# Altium PCB HV9150 DevKit.PcbDoc
Units mm, origin at the board's own origin, x right, y up, seen from the top; angles counter-clockwise.
Board outline 50 x 40 mm, 2 copper layers (Top Layer, Bottom Layer); 27 components, 23 nets, 90 pads, 31 vias.
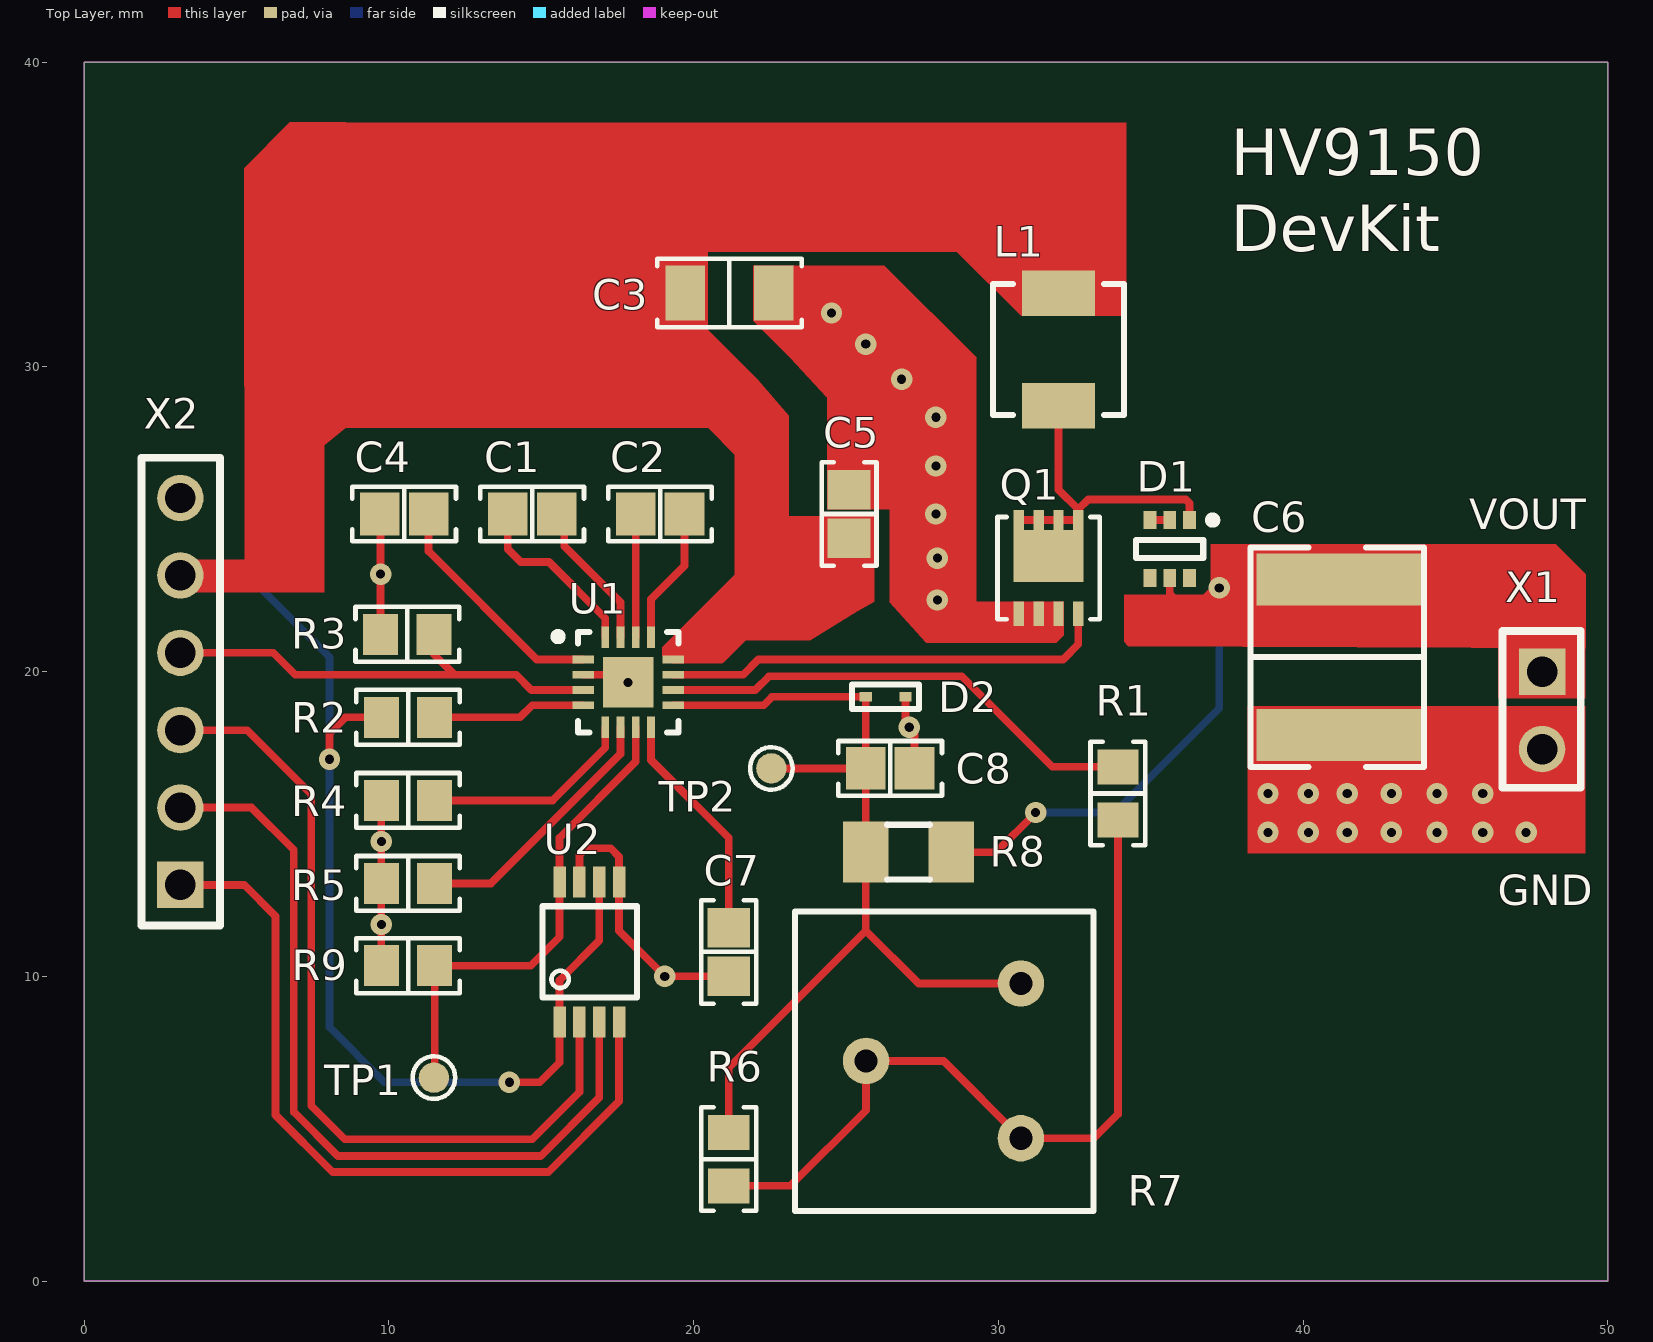
[diagram p0: Top Layer view]
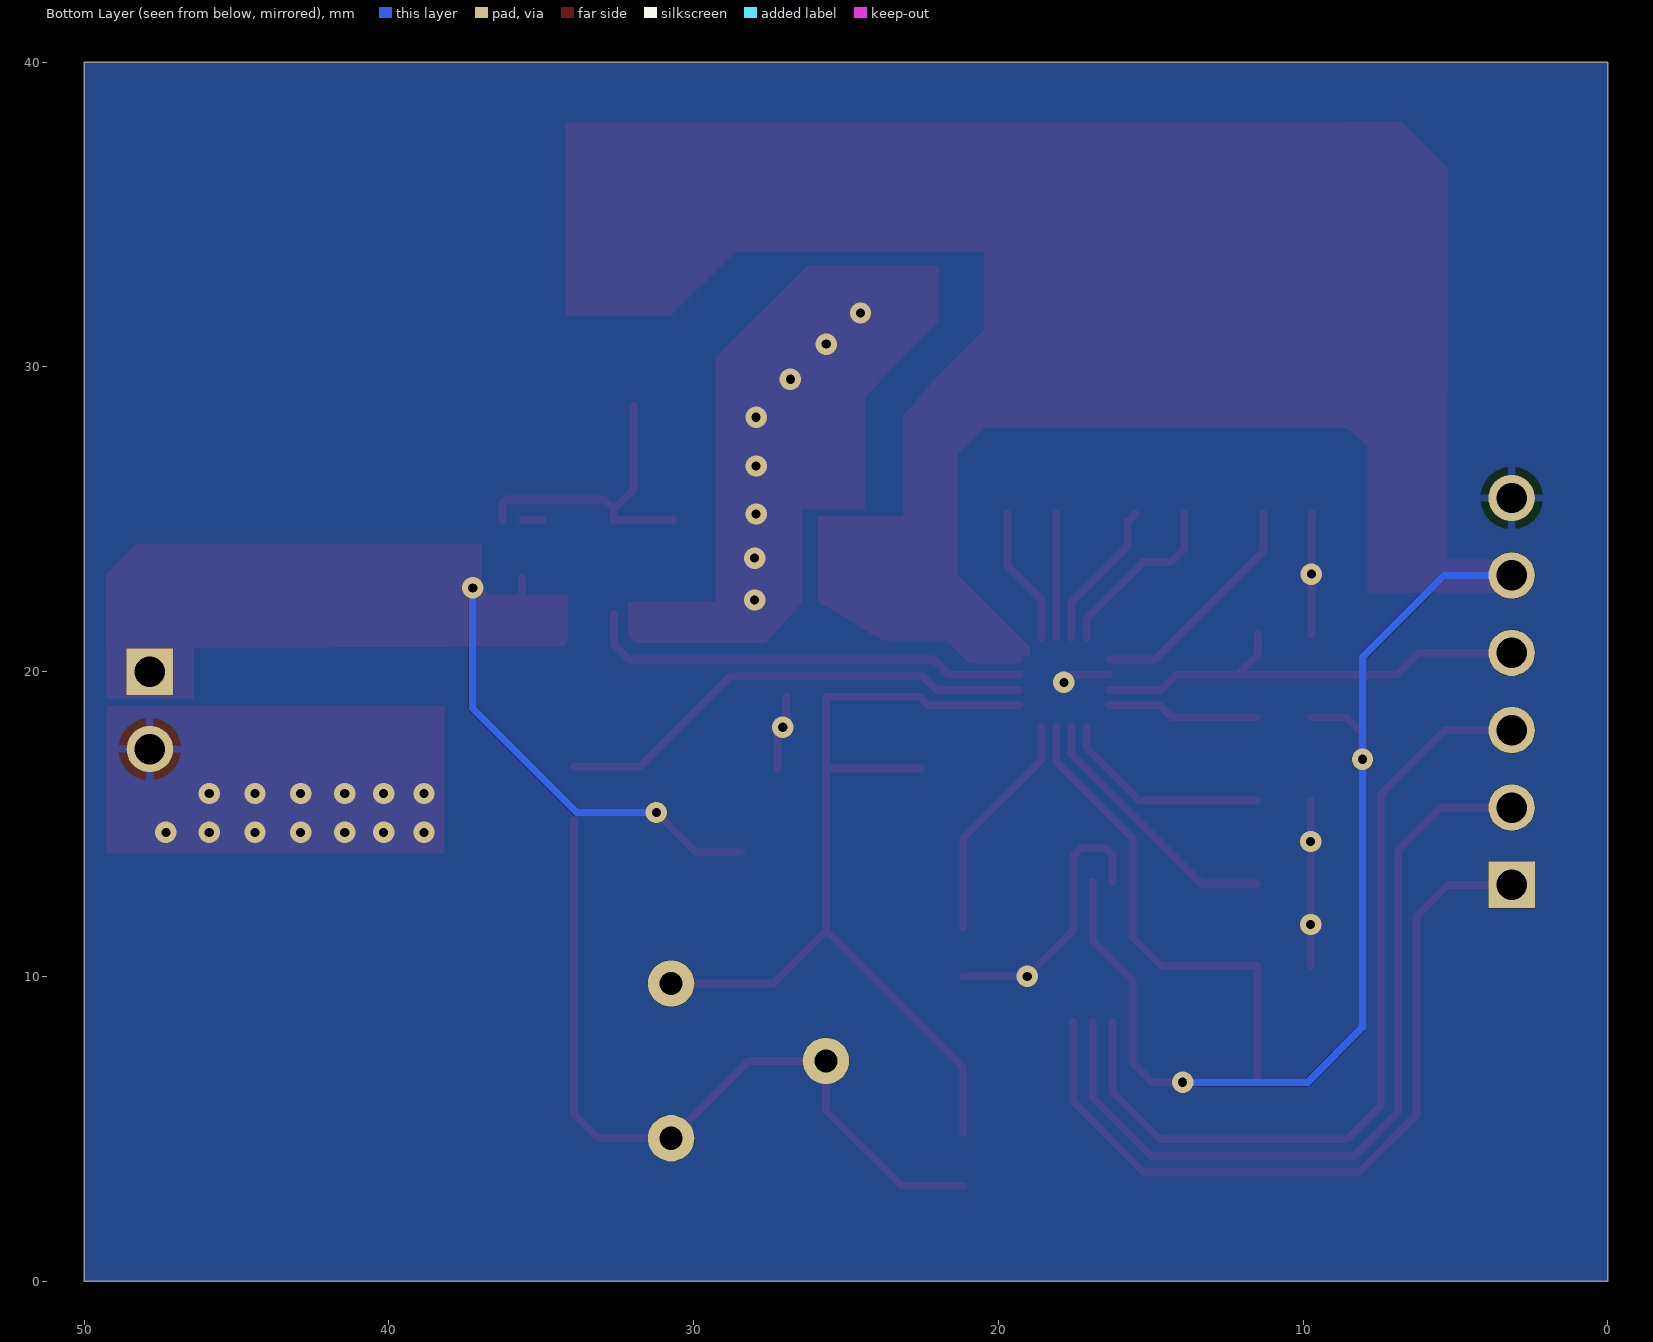
[diagram p1: Bottom Layer view, seen from below]
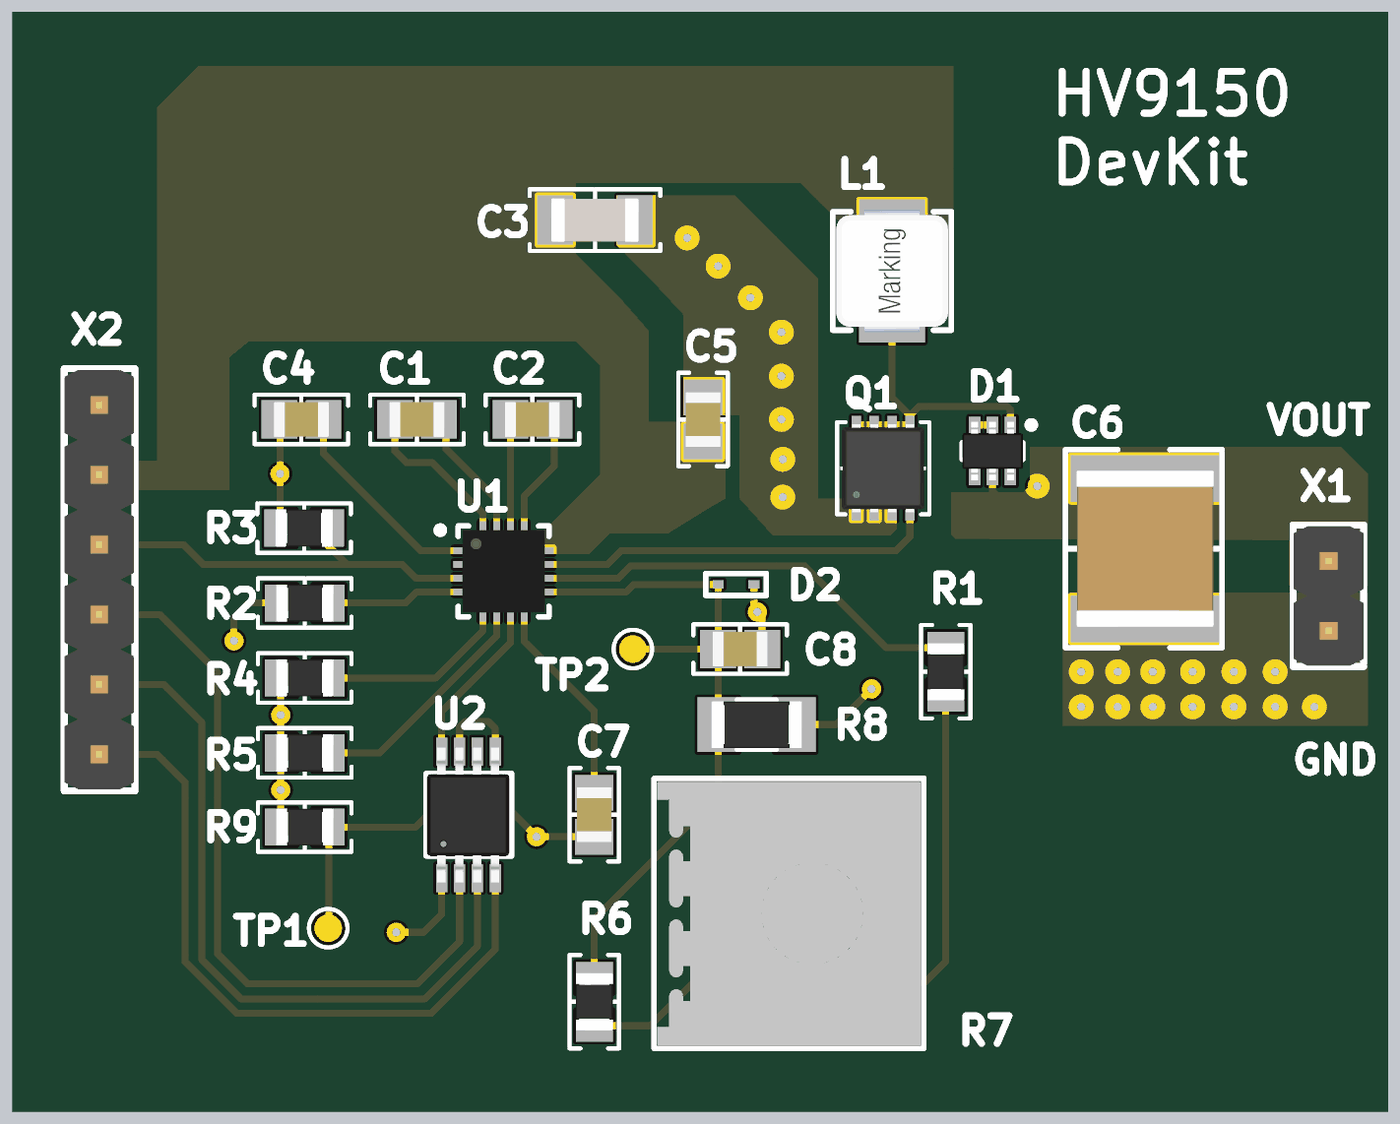
[diagram p2: 3D render of the assembled board from above, using the file's embedded part models]

## Layer stack, top to bottom
Top Solder: solder mask 0.0102, Solder Resist, Dk 3.5
Top Layer: signal copper 0.0356
Dielectric 1: dielectric 0.32, FR-4, Dk 4.8
Bottom Layer: signal copper 0.0356
Bottom Solder: solder mask 0.0102, Solder Resist, Dk 3.5

## Board outline
0,0 0,40 50,40 50,0

## Design rules (kind name [scope] priority, off if disabled: settings)
Clearance [All] p1 off: gap=0.254 ignorepadtopadclearanceinfootprint=TRUE except(0: Arc-Hole Track-Hole SMDPad-Hole THPad-Hole Via-Hole Fill-Hole Poly-Hole Region-Hole Text-Hole)
MinimumSolderMaskSliver [All] p1 off: minsoldermaskwidth=0.254
PolygonConnect [All] p1: connectstyle=Relief reliefconductorwidth=0.254 reliefentries=4 polygonreliefangle="90 Angle" airgapwidth=0.254
RoutingVias [All] p1: holewidth=0.711 width=1.27 viastyle="Through Hole" minholewidth=0.711 minwidth=1.27 maxholewidth=0.711 maxwidth=1.27
ShortCircuit [All] p1 off: allowed=FALSE
SilkToSolderMaskClearance [IsPad] p1 off: minsilkscreentomaskgap=0.254 clearancetoexposedcopper=TRUE
SolderMaskExpansion [All] p1: expansion=0.102
UnRoutedNet [All] p1 off:
Width [All] p1: maxlimit=0.254 minlimit=0.254 preferedwidth=0.254
26 further rules are at their usual default settings.

## Components (designator, comment, footprint, x,y, rotation, side; value= is the part's Value field where it differs from the comment)
C1 "220nF" "CAP 0805/2012" 14.7,25.175 r0 top
C2 "220nF" "CAP 0805/2012" 18.9,25.175 r0 top
C3 "22uF" "CAP 1206/3216" 21.175,32.425 r0 top
C4 "1uF" "CAP 0805/2012" 10.5,25.175 r0 top
C5 "1uF" "CAP 0805/2012" 25.1,25.175 r270 top
C6 "1uF" "CAP 2220/5650" 41.175,20.475 r90 top
C7 "1uF" "CAP 0805/2012" 21.15,10.8 r90 top
C8 "82pF" "CAP 0805/2012" 26.45,16.825 r180 top
D1 "BAV99S,115" SOT-363 35.625,24.025 r270 top
D2 "5V1" "DZ2705100L -  DIODO ZENER" 26.3,19.175 r180 top
L1 "6,8uH" WE-LHMI_4020 31.975,30.575 r90 top
Q1 "BSZ42DN25NS3G" BSZ42DN25NS3 31.65,23.4 r270 top
R1 "37K4" "RES 0805/2012" 33.925,16 r270 top
R2 "100K" "RES 0805/2012" 10.625,18.5 r0 top
R3 "100K" "RES 0805/2012" 10.6,21.225 r0 top
R4 "100K" "RES 0805/2012" 10.625,15.775 r0 top
R5 "127K" "RES 0805/2012" 10.625,13.05 r0 top
R6 "0" "RES 0805/2012" 21.15,4 r270 top
R7 "200K" "BOURNS 3386F" 28.2,7.225 r270 top
R8 "7M5" "RES 1206/3216" 27.05,14.075 r0 top
R9 "100K" "RES 0805/2012" 10.625,10.35 r180 top
TP1 "TESTPOINT" TP_SMD_Ø1.0mm 11.475,6.675 r0 top
TP2 "TESTPOINT" TP_SMD_Ø1.0mm 22.55,16.825 r90 top
U1 "HV9150K6-G" "QFN16 3X3" 17.85,19.65 r0 top
U2 "MCP4811-E/MS" MSOP8 16.575,10.8 r90 top
X1 "HEADER 2-WAY 2.54mm" "HEADER 2-WAY 2.54 mm" 47.85,20 r270 top
X2 "HEADER 6-WAY 2.54mm" "HEADER 6-WAY 2.54 mm" 3.15,13 r90 top

## Footprints (in the part's own frame and the unit in brackets; to place one, negate y for a bottom-side part, rotate by r counter-clockwise, add the part's x,y. Pads: shape width x height; smd on the part's side, far side on the other; paste and mask are expansions set on the pad)
"BOURNS 3386F" [mil]
  round 60 hole 30: 1(100,100) 2(0,-100) 3(-100,100)
  silkscreen extent -193,-192 194,194, body extent -188,-187 189,189, height 197
BSZ42DN25NS3 [mm]
  rect 0.8x0.34 smd: 1(1.5,-0.975) 2(1.5,-0.325) 3(1.5,0.325) 4(1.5,0.975)
  rect 0.65x0.34 on Top Paste: 3(-1.575,-0.325)
  rect 0.65x0.34 smd: 5(-1.575,0.975) 6(-1.575,0.325) 7(-1.575,-0.325) 8(-1.575,-0.975)
  rect 1.71x2.29 smd: ""(-0.395,0)
  silkscreen extent -1.68,-1.68 1.68,1.68, body extent -1.6,-1.55 1.6,1.55, height 0.8
"CAP 0805/2012" [mm] "Chip Capacitor, 2-Leads, Body 2.00x1.20mm, IPC Medium Density"
  rect 1.3x1.4 smd: 1(-0.8,0) 2(0.8,0)
  silkscreen extent -1.7,-0.9 1.7,0.9, body extent -1,-0.64 1,0.64, height 1.26
"CAP 1206/3216" [mm] "Chip Capacitor, 2-Leads, Body 3.25x1.60mm, IPC Medium Density"
  rect 1.3x1.8 smd: 1(-1.45,0) 2(1.45,0)
  silkscreen extent -2.37,-1.12 2.37,1.12, body extent -1.6,-0.8 1.6,0.8, height 1.2
"CAP 2220/5650" [mm] "Chip Capacitor, 2-Leads, Body 5.70x5.00mm, IPC Medium Density"
  rect 1.7x5.4 smd: 1(-2.55,0) 2(2.55,0)
  silkscreen extent -3.6,-2.8 3.6,2.9, body extent -2.85,-2.5 2.85,2.5, height 2
"DZ2705100L -  DIODO ZENER" [mm]
  rect 0.4x0.3 smd: 1(-0.65,0) 2(0.65,0)
  silkscreen extent -1.1,-0.4 1.1,0.4
"HEADER 2-WAY 2.54 mm" [mil]
  rect 60x60 hole 39.37: 1(0,0)
  round 60 hole 39.37: 2(100,0)
  silkscreen extent -53,-51 150,50, body extent -51,-50 149,50, height 337
"HEADER 6-WAY 2.54 mm" [mil]
  rect 60x60 hole 39.37: 1(0,0)
  round 60 hole 39.37: 2(100,0) 3(200,0) 4(300,0) 5(400,0) 6(500,0)
  silkscreen extent -53,-51 552,50, body extent -50,-110 550,50, height 337
MSOP8 [mm]
  rect 1.02x0.41 smd: 1(-2.3,0.975) 2(-2.3,0.325) 3(-2.3,-0.325) 4(-2.3,-0.975) 5(2.3,-0.975) 6(2.3,-0.325) 7(2.3,0.325) 8(2.3,0.975)
  silkscreen extent -1.5,-1.57 1.5,1.53, body extent -2.46,-1.49 2.44,1.51, height 1.15
"QFN16 3X3" [mm]
  rect 0.7x0.25 smd: 1(-1.475,0.75) 2(-1.475,0.25) 3(-1.475,-0.25) 4(-1.475,-0.75) 9(1.475,-0.75) 10(1.475,-0.25) 11(1.475,0.25) 12(1.475,0.75)
  rect 0.25x0.7 smd: 5(-0.75,-1.475) 6(-0.25,-1.475) 7(0.25,-1.475) 8(0.75,-1.475) 13(0.75,1.475) 14(0.25,1.475) 15(-0.25,1.475) 16(-0.75,1.475)
  rect 1.65x1.65 smd: 17(0,0)
  silkscreen extent -2.42,-1.65 1.65,1.65, body extent -1.5,-1.5 1.5,1.5, height 0.9
"RES 0805/2012" [mm] "Chip Resistor, 2-Leads, Body 2.00x1.25mm, IPC Medium Density"
  rect 1.15x1.35 smd: 1(-0.875,0) 2(0.875,0)
  silkscreen extent -1.7,-0.9 1.7,0.9, body extent -1.05,-0.67 1.05,0.68, height 0.6
"RES 1206/3216" [mm]
  rect 1.5x2 smd: 1(-1.4,0) 2(1.4,0)
  silkscreen extent -0.7,-0.9 0.7,0.9, body extent -1.65,-0.85 1.65,0.85, height 0.65
SOT-363 [mm] "SOT363, 6-Leads, Body 2.00x2.10mm, Pitch 0.65mm, IPC Medium Density"
  rect 0.6x0.42 smd: 1(-0.95,0.65) 2(-0.95,0) 3(-0.95,-0.65) 4(0.95,-0.65) 5(0.95,0) 6(0.95,0.65)
  silkscreen extent -1.07,-1.1 0.3,1.54, body extent -1.06,-1.1 1.06,1.1, height 1.05
TP_SMD_Ø1.0mm [mm]
  round 1 smd paste-5: 1(0,0)
  silkscreen extent -0.7,-0.7 0.7,0.7
WE-LHMI_4020 [mm] "SMT Power Inductor, 2-Leads, body 4.06x4.06mm"
  rect 1.5x2.4 smd: 1(-1.85,0) 2(1.85,0)
  silkscreen extent -2.15,-2.15 2.15,2.15, body extent -2.22,-2.03 2.23,2.03, height 1.8

## Part data
C1 C2: library part 0805YC224MAT2A, "CAPACITOR 220nF 0805 20%16V", Case/Package=0805, Case Code (Metric)=2012, Dielectric=X7R, Manufacturer="Kyocera AVX", Max Operating Temperature=125°C, Min Operating Temperature=-55°C, Package Quantity=4000, Tolerance=20%, Voltage Rating=16V, Capacitance=220nF, Case Code (Imperial)=0805, ComponentLink1Description=http://www.mouser.com/ds/2/40/X7RDielectric-777024.pdf?src-supplier=Mouser, ComponentLink1URL=http://www.mouser.com/ds/2/40/X7RDielectric-777024.pdf?src-supplier=Mouser, ComponentLink2Description=http://www.avx.com/docs/Catalogs/cx7r.pdf?src-supplier=Avnet, ComponentLink2URL=http://www.avx.com/docs/Catalogs/cx7r.pdf?src-supplier=Avnet, ComponentLink3Description=http://datasheets.avx.com/X7RDielectric.pdf?src-supplier=Digi-Key, ComponentLink3URL=http://datasheets.avx.com/X7RDielectric.pdf?src-supplier=Digi-Key, Depth=1.25mm, Dissipation Factor=3.5%, Height=0.94mm, Lead Free="Lead Free", Length=2.01mm, Manufacturer Part Number=0805YC224MAT2A, Mount="Surface Mount", Number of Pins=2, Packaging="Tape and Reel", Pricing 1="4000=0.0977, 8000=0.0958, 16000=0.0934 (EUR)", REACH SVHC=Unknown, Stock 1=0, Supplier 1=Farnell, Termination=SMD/SMT, Thickness=0.037inch, Voltage Rating (DC)=16V, Width=1.25mm
C3: library part F931C226MAA, "CAPACITOR 22uF 1206 20% 16V", Manufacturer="Kyocera AVX", Manufacturer Part Number=F931C226MAA, Pricing 1="150=0.395, 250=0.29, 500=0.249, 1000=0.22, 2000=0.188, 10000=0.173 (EUR)", Stock 1=0, Supplier 1=Farnell
C4 C5 C7: library part CC0805KKX7R7BB105, "CAPACITOR 1uF 0805 10% 16V", Case/Package=0805, Case Code (Metric)=2012, Dielectric=X7R, Manufacturer=Yageo, Max Operating Temperature=125°C, Min Operating Temperature=-55°C, Package Quantity=1, Tolerance=10%, Voltage Rating=16V, Capacitance=1uF, Case Code (Imperial)=0805, ComponentLink1Description=http://www.yageo.com/documents/recent/UPY-GPHC_X7R_6.3V-to-50V_18.pdf?src-supplier=Digi-Key, ComponentLink1URL=http://www.yageo.com/documents/recent/UPY-GPHC_X7R_6.3V-to-50V_18.pdf?src-supplier=Digi-Key, ComponentLink2Description=http://www.mouser.com/ds/2/447/Yageo_UPY-GP_NP0_16V-to-50V_9-358835.pdf?src-supplier=Mouser, ComponentLink2URL=http://www.mouser.com/ds/2/447/Yageo_UPY-GP_NP0_16V-to-50V_9-358835.pdf?src-supplier=Mouser, ComponentLink3Description=https://www.verical.com/server-webapp/html/getDatasheet?partID=251802&src-supplier=Verical, ComponentLink3URL=https://www.verical.com/server-webapp/html/getDatasheet?partID=251802&src-supplier=Verical, ComponentLink4Description=http://www.farnell.com/datasheets/1489800.pdf?src-supplier=Element14, ComponentLink4URL=http://www.farnell.com/datasheets/1489800.pdf?src-supplier=Element14, ComponentLink5Description=http://www.yageo.com/documents/recent/UPY-GPHC_X7R_6.3V-to-50V_8.pdf?src-supplier=Avnet, ComponentLink5URL=http://www.yageo.com/documents/recent/UPY-GPHC_X7R_6.3V-to-50V_8.pdf?src-supplier=Avnet, Depth=1.25mm, Halogen Free="Halogen Free", Lead Free="Lead Free", Length=2mm, Manufacturer Part Number=CC0805KKX7R7BB105, Mount="Surface Mount", Packaging="Tape and Reel", Radiation Hardening=No, REACH SVHC="No SVHC", Stock 1=0, Supplier 1=Farnell, Termination=SMD/SMT, Thickness=0.049inch, Voltage Rating (DC)=16V, Width=0.049inch
C6: library part C2220C105MCR2C7186, "CAPACITOR 1uF 2220 20% 500V", Case/Package=2220, Case Code (Metric)=5650, Dielectric=X7R, Dielectric Material=Ceramic, Manufacturer=KEMET, Max Operating Temperature=125°C, Min Operating Temperature=-55°C, Package Quantity=1, Tolerance=20%, Voltage Rating=500V, Voltage Rating (DC)=1kV, Capacitance=1uF, Case Code (Imperial)=2220, ComponentLink1Description=https://search.kemet.com/component-edge/download/datasheet/C2220C105MCR2C7186.pdf?src-supplier=Digi-Key, ComponentLink1URL=https://search.kemet.com/component-edge/download/datasheet/C2220C105MCR2C7186.pdf?src-supplier=Digi-Key, ComponentLink2Description=https://api.kemet.com/component-edge/download/datasheet/C2220C105MCR2C7186.pdf?src-supplier=Digi-Key, ComponentLink2URL=https://api.kemet.com/component-edge/download/datasheet/C2220C105MCR2C7186.pdf?src-supplier=Digi-Key, Depth=5mm, Height=5mm, Length=6mm, Manufacturer Part Number=C2220C105MCR2C7186, Mount="Surface Mount", Packaging="Tape and Reel", Stock 1=0, Supplier 1=Farnell, Termination=SMD/SMT, Thickness=0.217inch, Width=5mm
C8: library part MC0805N820K500CT, "CAPACITOR 82pF 0805 5% 50V", Case/Package=0805, Case Code (Metric)=2012, Dielectric=C0G, Manufacturer=Multicomp, Max Operating Temperature=125°C, Min Operating Temperature=-55°C, Tolerance=10%, Voltage Rating=50V, Capacitance=82pF, Case Code (Imperial)=0805, ComponentLink1Description=http://www.newark.com/pdfs/datasheets/spc/Ta-1100.pdf?src-supplier=Element14, ComponentLink1URL=http://www.newark.com/pdfs/datasheets/spc/Ta-1100.pdf?src-supplier=Element14, Manufacturer Part Number=MC0805N820K500CT, Number of Pins=2, Packaging="Cut Tape", Pricing 1="1=0.0563, 10=0.0483, 50=0.0402, 100=0.0313, 250=0.0245, 500=0.0201 (EUR)", REACH SVHC=Unknown, Stock 1=3804, Supplier 1=Farnell, Voltage Rating (DC)=50V
D1: "BAV99S Diodes 100 V", Average Rectified Current=200mA, Case/Package=TSSOP, Current=2A, Forward Voltage=1.25V, Manufacturer="NXP Semiconductors", Max Forward Surge Current (Ifsm)=4A, Max Operating Temperature=150°C, Max Repetitive Reverse Voltage (Vrrm)=100V, Max Reverse Leakage Current=500nA, Min Operating Temperature=-65°C, Package Quantity=1, Power Dissipation=250mW, Voltage=75V, ComponentLink1Description=http://www.nxp.com/documents/data_sheet/BAV99_SER.pdf?ecmp=mouser&src-supplier=Mouser, ComponentLink1URL=http://www.nxp.com/documents/data_sheet/BAV99_SER.pdf?ecmp=mouser&src-supplier=Mouser, ComponentLink2Description=http://www.nxp.com/documents/data_sheet/BAV99_SER.pdf?src-supplier=Future+Electronics, ComponentLink2URL=http://www.nxp.com/documents/data_sheet/BAV99_SER.pdf?src-supplier=Future+Electronics, ComponentLink3Description=http://www.farnell.com/datasheets/953882.pdf?src-supplier=Element14, ComponentLink3URL=http://www.farnell.com/datasheets/953882.pdf?src-supplier=Element14, ComponentLink4Description=http://www.nxp.com/documents/data_sheet/BAV99_SER.pdf?src-supplier=Avnet+Europe, ComponentLink4URL=http://www.nxp.com/documents/data_sheet/BAV99_SER.pdf?src-supplier=Avnet+Europe, ComponentLink5Description=http://www.farnell.com/datasheets/953882.pdf?src-supplier=Farnell, ComponentLink5URL=http://www.farnell.com/datasheets/953882.pdf?src-supplier=Farnell, ComponentLink6Description=http://www.nxp.com/documents/data_sheet/BAV99_SER.pdf?src-supplier=Avnet, ComponentLink6URL=http://www.nxp.com/documents/data_sheet/BAV99_SER.pdf?src-supplier=Avnet, ComponentLink7Description=http://www.nxp.com/documents/data_sheet/BAV99_SER.pdf?src-supplier=Digi-Key, ComponentLink7URL=http://www.nxp.com/documents/data_sheet/BAV99_SER.pdf?src-supplier=Digi-Key, ComponentLink8Description=http://www.nxp.com/documents/data_sheet/BAV99_SER.pdf?src-supplier=Avnet+Asia, ComponentLink8URL=http://www.nxp.com/documents/data_sheet/BAV99_SER.pdf?src-supplier=Avnet+Asia, Forward Current=200mA, Height=1mm, Lead Free="Lead Free", Length=2.2mm, Manufacturer Part Number=BAV99S,115, Max Reverse Voltage (DC)=100V, Max Surge Current=4A, Mount="Surface Mount", Number of Pins=6, Packaging="Tape and Reel", Peak Non-Repetitive Surge Current=4A, Peak Reverse Current=500nA, Pricing 1="3000=0.0431, 9000=0.0336 (EUR)", Radiation Hardening=No, REACH SVHC="No SVHC", Recovery Time=4ns, Reverse Recovery Time=4ns, Stock 1=54000, Supplier 1=Farnell, Weight=0.01lb, Width=1.35mm
D2: library part DZ2705100L, "ZENER Diode 5V1", Case/Package=SMD/SMT, Forward Voltage=1V, Manufacturer="Panasonic SSG", Max Operating Temperature=150°C, Max Power Dissipation=120mW, Max Reverse Leakage Current=1uA, Min Operating Temperature=-40°C, Package Quantity=10000, Test Current=5mA, Tolerance=5%, Zener Voltage=5.1V, ComponentLink1Description=http://www.farnell.com/datasheets/1912112.pdf?src-supplier=Element14, ComponentLink1URL=http://www.farnell.com/datasheets/1912112.pdf?src-supplier=Element14, Element Configuration=Single, Height=0.47mm, Impedance=60R, Lead Free="Lead Free", Length=1mm, Manufacturer Part Number=DZ2705100L, Mount="Surface Mount", Number of Pins=2, Packaging="Tape and Reel", Pricing 1="5=0.186, 25=0.182, 100=0.0832, 250=0.0767, 500=0.0588, 1000=0.0357, 5000=0.0284 (EUR)", REACH SVHC=Unknown, Stock 1=0, Supplier 1=Farnell, Voltage Tolerance=5%, Width=0.6mm
L1: library part 74437324068, "INDUCTOR 6,8 uH 20% 1,75 A", Case/Package=Nonstandard, Current Rating=1.75A, DC Resistance (DCR)=172mR, Frequency=29MHz, Inductance=6.8uH, Inductance Tolerance=20%, Manufacturer="Wurth Electronics", Max Operating Temperature=125°C, Min Operating Temperature=-40°C, Package Quantity=3000, Saturation Current=3.5A, Test Frequency=100kHz, ComponentLink1Description=http://www.farnell.com/datasheets/1735828.pdf?src-supplier=Element14, ComponentLink1URL=http://www.farnell.com/datasheets/1735828.pdf?src-supplier=Element14, ComponentLink2Description=http://katalog.we-online.de/pbs/datasheet/74437324068.pdf?src-supplier=Digi-Key, ComponentLink2URL=http://katalog.we-online.de/pbs/datasheet/74437324068.pdf?src-supplier=Digi-Key, ComponentLink3Description=http://www.mouser.com/ds/2/445/74437324068-538785.pdf?src-supplier=Mouser, ComponentLink3URL=http://www.mouser.com/ds/2/445/74437324068-538785.pdf?src-supplier=Mouser, Composition=Wirewound, Core Material=Ferrite,Composite, Depth=4.06mm, Height=1.8mm, Height - Seated (Max)=0.079inch, Length=4.45mm, Manufacturer Part Number=74437324068, Max DC Current=1.75A, Mount="Surface Mount", Packaging="Tape and Reel", REACH SVHC=Unknown, RMS Current (Irms)=1.75A, Self Resonant Frequency=29MHz, Series Resistance=172mR, Shielding=Shielded, Stock 1=0, Supplier 1=Farnell, Termination=SMD/SMT, Tolerance=20%, Width=4.06mm
Q1: "BSZ42DN25NS3G 250 V MOSFET", Case/Package=TO-220-3, Continuous Drain Current (ID)=5A, Drain to Source Breakdown Voltage=250V, Drain to Source Resistance=425mR, Gate to Source Voltage (Vgs)=20V, Input Capacitance=530pF, Manufacturer=Infineon, Max Operating Temperature=150°C, Max Power Dissipation=40W, Min Operating Temperature=-55°C, Package Quantity=1, Power Dissipation=33.8W, ComponentLink1Description=http://www.infineon.com/dgdl/BSZ42DN25NS3+Rev2.2.pdf?folderId=db3a304325305e6d012596c6ca7b290a&fileId=db3a30432ad629a6012b15e5a93b1a8b&src-supplier=Digi-Key, ComponentLink1URL=http://www.infineon.com/dgdl/BSZ42DN25NS3+Rev2.2.pdf?folderId=db3a304325305e6d012596c6ca7b290a&fileId=db3a30432ad629a6012b15e5a93b1a8b&src-supplier=Digi-Key, ComponentLink2Description=http://www.mouser.com/ds/2/196/BSZ42DN25NS3%20Rev2.3-91542.pdf?src-supplier=Mouser, ComponentLink2URL=http://www.mouser.com/ds/2/196/BSZ42DN25NS3%20Rev2.3-91542.pdf?src-supplier=Mouser, Element Configuration=Single, Fall Time=5ns, Halogen Free="Halogen Free", Height=1.1mm, Length=3.4mm, Manufacturer Part Number=BSZ42DN25NS3G, Number of Pins=8, Packaging="Tape and Reel", Rds On Max=400mR, Rise Time=2ns, Stock 1=0, Supplier 1=Mouser, Turn-Off Delay Time=8ns, Turn-On Delay Time=3ns, Width=3.4mm
R1: library part ERJ6ENF3742V, "RESISTOR 37K4 0805 1% 1/8mW", Case/Package=0805, Case Code (Metric)=2012, Manufacturer=Panasonic, Manufacturer Part Number=ERJ-6ENF3742V, Max Operating Temperature=155°C, Max Power Dissipation=125mW, Min Operating Temperature=-55°C, Package Quantity=1, Resistance=37.4kR, Temperature Coefficient=100ppm/°C, Tolerance=1%, Voltage Rating=150V, Case Code (Imperial)=0805, ComponentLink1Description=http://www.farnell.com/datasheets/1678782.pdf?src-supplier=Farnell, ComponentLink1URL=http://www.farnell.com/datasheets/1678782.pdf?src-supplier=Farnell, ComponentLink2Description=http://www.industrial.panasonic.com/www-data/pdf/AOA0000/AOA0000CE2.pdf?src-supplier=Element14, ComponentLink2URL=http://www.industrial.panasonic.com/www-data/pdf/AOA0000/AOA0000CE2.pdf?src-supplier=Element14, ComponentLink3Description=http://www.farnell.com/datasheets/1678782.pdf?src-supplier=Element14, ComponentLink3URL=http://www.farnell.com/datasheets/1678782.pdf?src-supplier=Element14, ComponentLink4Description=http://industrial.panasonic.com/www-data/pdf/AOA0000/AOA0000CE2.pdf?src-supplier=Avnet, ComponentLink4URL=http://industrial.panasonic.com/www-data/pdf/AOA0000/AOA0000CE2.pdf?src-supplier=Avnet, Composition="Thick Film", Contact Plating=Tin, Depth=1.25mm, Features="Automotive AEC-Q200", Height=0.6mm, Height - Seated (Max)=0.028inch, Lead Free="Lead Free", Length=2mm, Military Standard=Not, Mount="Surface Mount", Number of Terminations=2, Packaging="Tape and Reel", Power Rating=125mW, REACH SVHC=Unknown, Stock 1=0, Supplier 1=Farnell, Termination=SMD/SMT, Voltage Rating (DC)=150V, Width=1.2mm
R2 R3 R4 R9: library part ERJ-6ENF1003V, "RESISTOR 100K 0805 1% 1/8W", Case/Package=0805, Case Code (Metric)=2012, Manufacturer=Panasonic, Max Operating Temperature=155°C, Max Power Dissipation=125mW, Min Operating Temperature=-55°C, Package Quantity=1, Resistance=100kR, Temperature Coefficient=100ppm/°C, Tolerance=1%, Voltage Rating=150V, Case Code (Imperial)=0805, ComponentLink1Description=http://www.farnell.com/datasheets/426256.pdf?src-supplier=Element14, ComponentLink1URL=http://www.farnell.com/datasheets/426256.pdf?src-supplier=Element14, ComponentLink2Description=http://www.farnell.com/datasheets/1678782.pdf?src-supplier=Element14, ComponentLink2URL=http://www.farnell.com/datasheets/1678782.pdf?src-supplier=Element14, ComponentLink3Description=http://www.jameco.com/Jameco/Products/ProdDS/1988989.pdf?src-supplier=Jameco, ComponentLink3URL=http://www.jameco.com/Jameco/Products/ProdDS/1988989.pdf?src-supplier=Jameco, ComponentLink4Description=http://industrial.panasonic.com/www-data/pdf/AOA0000/AOA0000CE2.pdf?src-supplier=Future+Electronics, ComponentLink4URL=http://industrial.panasonic.com/www-data/pdf/AOA0000/AOA0000CE2.pdf?src-supplier=Future+Electronics, ComponentLink5Description=http://industrial.panasonic.com/www-data/pdf/AOA0000/AOA0000CE2.pdf?src-supplier=Avnet+Europe, ComponentLink5URL=http://industrial.panasonic.com/www-data/pdf/AOA0000/AOA0000CE2.pdf?src-supplier=Avnet+Europe, ComponentLink6Description=http://www.mouser.com/ds/2/315/AOA0000C283-1093288.pdf?src-supplier=Mouser, ComponentLink6URL=http://www.mouser.com/ds/2/315/AOA0000C283-1093288.pdf?src-supplier=Mouser, ComponentLink7Description=https://www.alliedelec.com/m/d/623f45ff1957d936ff56d46fd1c28cac.pdf?src-supplier=Allied+Electronics, ComponentLink7URL=https://www.alliedelec.com/m/d/623f45ff1957d936ff56d46fd1c28cac.pdf?src-supplier=Allied+Electronics, ComponentLink8Description=http://industrial.panasonic.com/www-data/pdf/AOA0000/AOA0000CE2.pdf?src-supplier=Avnet, ComponentLink8URL=http://industrial.panasonic.com/www-data/pdf/AOA0000/AOA0000CE2.pdf?src-supplier=Avnet, Composition="Thick Film", Contact Plating=Tin, Depth=1.25mm, Features="Automotive AEC-Q200", Height=0.6mm, Lead Free="Lead Free", Length=2mm, Manufacturer Part Number=ERJ-6ENF1003V, Military Standard=Not, Mount="Surface Mount", Number of Pins=2, Number of Terminations=2, Packaging="Tape and Reel", Power Rating=125mW, Radiation Hardening=No, REACH SVHC="No SVHC", Stock 1=0, Supplier 1=Farnell, Termination=SMD/SMT, Voltage Rating (DC)=150V, Width=0.049inch
R5: library part ERJ6ENF1273V, "RESISTOR 127K 0805 1% 1/8mW", Case/Package=0805, Case Code (Metric)=2012, Manufacturer=Panasonic, Max Operating Temperature=155°C, Max Power Dissipation=125mW, Min Operating Temperature=-55°C, Package Quantity=1, Resistance=127kR, Temperature Coefficient=100ppm/°C, Tolerance=1%, Voltage Rating=150V, Case Code (Imperial)=0805, ComponentLink1Description=http://www.farnell.com/datasheets/1678782.pdf?src-supplier=Element14, ComponentLink1URL=http://www.farnell.com/datasheets/1678782.pdf?src-supplier=Element14, ComponentLink2Description=http://industrial.panasonic.com/www-data/pdf/AOA0000/AOA0000CE2.pdf?src-supplier=Avnet, ComponentLink2URL=http://industrial.panasonic.com/www-data/pdf/AOA0000/AOA0000CE2.pdf?src-supplier=Avnet, ComponentLink3Description=http://www.mouser.com/ds/2/315/AOA0000C283-1093288.pdf?src-supplier=Mouser, ComponentLink3URL=http://www.mouser.com/ds/2/315/AOA0000C283-1093288.pdf?src-supplier=Mouser, Composition="Thick Film", Contact Plating=Tin, Depth=1.25mm, Features="Automotive AEC-Q200", Height=0.028inch, Lead Free="Lead Free", Length=2mm, Manufacturer Part Number=ERJ6ENF1273V, Military Standard=Not, Mount="Surface Mount", Number of Terminations=2, Packaging="Tape and Reel", Power Rating=125mW, REACH SVHC=Yes, Stock 1=0, Supplier 1=Farnell, Voltage Rating (DC)=150V, Width=0.049inch
R6: library part CRCW08050000Z0ECC, "RESISTOR 0K 0805 1% 1/8mW", Manufacturer="Vishay Dale", Manufacturer Part Number=CRCW08050000Z0ECC, Pricing 1="1=0.1, 10=0.029, 50=0.029, 100=0.011, 1000=0.004, 10000=0.004 (USD)", Stock 1=39810, Supplier 1=Mouser
R7: library part 3386F-1-204TLF, "POT 200K 3386F 10% 500mW trimmer potentiometer", Manufacturer=Bourns, Max Operating Temperature=125°C, Max Power Dissipation=500mW, Min Operating Temperature=-55°C, Package Quantity=100, Resistance=200kR, Temperature Coefficient=100ppm/°C, Tolerance=10%, Voltage Rating=300V, ComponentLink1Description=http://uk.rs-online.com/webdocs/069c/0900766b8069ccf9.pdf?src-supplier=RSComponents, ComponentLink1URL=http://uk.rs-online.com/webdocs/069c/0900766b8069ccf9.pdf?src-supplier=RSComponents, ComponentLink2Description=http://www.farnell.com/datasheets/1815119.pdf?src-supplier=Element14, ComponentLink2URL=http://www.farnell.com/datasheets/1815119.pdf?src-supplier=Element14, ComponentLink3Description=http://www.bourns.com/data/global/pdfs/3386.pdf?src-supplier=Avnet, ComponentLink3URL=http://www.bourns.com/data/global/pdfs/3386.pdf?src-supplier=Avnet, ComponentLink4Description=http://www.bourns.com/docs/Product-Datasheets/3386.pdf?src-supplier=Digi-Key, ComponentLink4URL=http://www.bourns.com/docs/Product-Datasheets/3386.pdf?src-supplier=Digi-Key, Composition=Cermet, Depth=9.53mm, Height=0.19inch, Length=9.53mm, Manufacturer Part Number=3386F-1-204TLF, Military Standard=Not, Mount="Through Hole", Number of Turns=1, Packaging=Rail/Tube, Power Rating=500mW, Pricing 1="1=2.48, 10=1.95, 50=1.88, 100=1.73, 1000=1.35, 10000=1.08 (USD)", Radiation Hardening=No, REACH SVHC="No SVHC", Stock 1=198, Supplier 1=Mouser, Termination=Pin, Weight=0.03oz
R8: library part MCHVR06FTFV7504, "RESISTOR 7M5, 1206, 1%, 0.25W,  500V", Manufacturer=Multicomp, Manufacturer Part Number=MCHVR06FTFV7504, Pricing 1="10=0.16, 100=0.107, 500=0.0719, 1000=0.0618, 2500=0.0542, 5000=0.0443, 25000=0.0403, 50000=0.0345 (EUR)", Stock 1=4730, Supplier 1=Farnell
U1: Case/Package=QFN, Manufacturer="Microchip Supertex", Manufacturer Part Number=HV9150K6-G, Number of Pins=16, Packaging="Tape and Reel", Pricing 1="1=1.49, 10=1.47, 50=1.24, 100=1.13, 1000=1.13, 10000=1.13 (USD)", Stock 1=284, Supplier 1=Mouser
U2: Case/Package=MSOP, Input Offset Voltage (Vos)=820uV, Manufacturer=Microchip, Max Operating Temperature=125°C, Max Supply Voltage=5.5V, Min Operating Temperature=-40°C, Min Supply Voltage=2.7V, Nominal Supply Current=330uA, Operating Supply Voltage=5V, Package Quantity=100, Reference Voltage=2.048V, ComponentLink1Description=https://www.verical.com/server-webapp/html/getDatasheet?partID=723094&src-supplier=Verical, ComponentLink1URL=https://www.verical.com/server-webapp/html/getDatasheet?partID=723094&src-supplier=Verical, ComponentLink2Description=http://ww1.microchip.com/downloads/en/DeviceDoc/22244B.pdf?src-supplier=Avnet, ComponentLink2URL=http://ww1.microchip.com/downloads/en/DeviceDoc/22244B.pdf?src-supplier=Avnet, ComponentLink3Description=http://www.microchip.com/mymicrochip/filehandler.aspx?ddocname=en547908&src-supplier=Digi-Key, ComponentLink3URL=http://www.microchip.com/mymicrochip/filehandler.aspx?ddocname=en547908&src-supplier=Digi-Key, ComponentLink4Description=http://ww1.microchip.com/downloads/en/DeviceDoc/22244B.pdf?src-supplier=Avnet+Europe, ComponentLink4URL=http://ww1.microchip.com/downloads/en/DeviceDoc/22244B.pdf?src-supplier=Avnet+Europe, ComponentLink5Description=http://www.farnell.com/datasheets/630375.pdf?src-supplier=Element14, ComponentLink5URL=http://www.farnell.com/datasheets/630375.pdf?src-supplier=Element14, ComponentLink6Description=https://www.distrelec.biz/Web/Downloads/he/et/MCP4801_11_eng_datasheet.pdf?mime=application%2Fpdf&src-supplier=Distrelec, ComponentLink6URL=https://www.distrelec.biz/Web/Downloads/he/et/MCP4801_11_eng_datasheet.pdf?mime=application%2Fpdf&src-supplier=Distrelec, ComponentLink7Description=http://www.mouser.com/ds/2/268/22244B-54643.pdf?src-supplier=Mouser, ComponentLink7URL=http://www.mouser.com/ds/2/268/22244B-54643.pdf?src-supplier=Mouser, ComponentLink8Description=http://www.produktinfo.conrad.com/datenblaetter/1000000-1099999/001083269-da-01-en-DAC_10B_SPI_VREF_MCP4811_E_MS_MSOP_8_MCP.pdf?src-supplier=Conrad, ComponentLink8URL=http://www.produktinfo.conrad.com/datenblaetter/1000000-1099999/001083269-da-01-en-DAC_10B_SPI_VREF_MCP4811_E_MS_MSOP_8_MCP.pdf?src-supplier=Conrad, Height=0.95mm, Integral Nonlinearity (INL)=3.5LSB, Interface=SPI,Serial, Lead Free="Lead Free", Length=3mm, Manufacturer Part Number=MCP4811-E/MS, Mount="Surface Mount", Number of Bits=10, Number of Channels=1, Number of Converters=1, Number of DAC Channels=1, Number of Pins=8, Output Type=Voltage, Packaging=Rail/Tube, Polarity=Bipolar, Pricing 1="1=1.66, 10=1.64, 50=1.39, 100=1.25, 1000=1.25, 10000=1.25 (USD)", Radiation Hardening=No, REACH SVHC="No SVHC", Resolution=10b, Settling Time=4.5us, Stock 1=905, Supplier 1=Mouser, Width=3mm
X1: "HEADER 2-WAY"
X2: "HEADER 6-WAY"

## Via types
v1: diameter 0.7, hole 0.3, Top Layer to Bottom Layer, 31 vias

## Nets (pads, with @x,y where several pads share a name; then routed paths per layer and width w, separated by ;. In a path a pad name is that pad's centre, name@x,y a point inside that pad or via, vN(x,y) a via of type N, cw(c..) or ccw(c..) an arc to the next point about the centre after c; other vN are vias at no path point)
CS: U2.2 X2.3 | length 27.6
  Top Layer w0.254: X2.3 5.345,18.08 7.45,15.975 7.45,5.75 8.55,4.65 14.7,4.65 16.25,6.2 U2.2
EN: R3.2 U1.3 X2.4 | length 15.3
  Top Layer w0.254: X2.4 6.205,20.62 6.925,19.9 12.15,19.9 ; R3.2 11.475,20.575 12.15,19.9 ; U1.3 14.675,19.4 14.175,19.9 12.15,19.9
GND: C3.2 C4.1 C5.1 C6.1 C7.1 C8.1 D2.1 Q1.1 Q1.2 Q1.3@31.975,21.9 R3.1 R4.1 R5.1 R9.2 U1.2 U1.17 U2.5 U2.7 X1.2 X2.6 | length 30.6
  Top Layer w0.254: C4.1 9.725,25.15 R3.1 ; R9.2 R4.1 ; U2.7 16.25,13.975 16.475,14.2 17.275,14.2 17.55,13.925 U2.5 17.55,11.5 v1(19.05,10) C7.1 ; U1.2 17.6,19.9 v1(17.85,19.65) ; D2.1 26.95,18.35 27.25,18.05 C8.1 ; Q1.1 Q1.2 Q1.3@31.975,21.9 ; C6.1 47.125,17.925 47.59,17.46 X1.2
  other v1: 9.75,11.7 9.75,14.425 38.85,14.725 40.175,14.725 41.45,14.725 42.9,14.725 44.4,14.725 45.9,14.725 47.325,14.725 38.85,16 40.175,16 41.45,16 42.9,16 44.4,16 45.9,16 27.075,18.175 28,22.35 9.725,23.2 28,23.725 27.95,25.175 27.95,26.75 27.95,28.35 26.825,29.6 25.65,30.75 24.525,31.775
MOSI: U2.4 X2.1 | length 25.7
  Top Layer w0.254: X2.1 5.25,13 6.275,11.975 6.275,5.45 8.15,3.575 15.225,3.575 17.55,5.9 U2.4
NetC1_1: C1.1 U1.16 | length 5.9
  Top Layer w0.254: C1.1 13.9,24.025 14.325,23.6 15.25,23.6 17.1,21.75 U1.16
NetC1_2: C1.2 U1.15 | length 4.9
  Top Layer w0.254: C1.2 15.75,24.925 15.75,24.125 17.6,22.275 U1.15
NetC2_1: C2.1 U1.14 | length 4.1
  Top Layer w0.254: U1.14 C2.1
NetC2_2: C2.2 U1.13 | length 4.5
  Top Layer w0.254: U1.13 18.6,22.375 19.7,23.475 C2.2
NetC4_2: C4.2 U1.1 | length 7.8
  Top Layer w0.254: C4.2 11.3,23.95 14.85,20.4 U1.1
NetC6_2: C6.2 D1.5 R8.2 X1.1 | length 30.2
  Top Layer w0.254: R8.2 29.925,14.075 v1(31.225,15.375) ; D1.5 35.625,22.55 35.775,22.4 36.9,22.4 37.525,23.025 C6.2 46.775,23.025 47.85,21.95 X1.1
  Bottom Layer w0.254: v1(31.225,15.375) 33.825,15.375 37.25,18.8 v1(37.25,22.75)
NetC7_2: C7.2 U1.8 | length 7.6
  Top Layer w0.254: U1.8 18.6,17.1 21.15,14.55 C7.2
NetC8_2: C8.2 D2.2 R6.1 R7.3 R8.1 TP2.1 U1.9 | length 31.5
  Top Layer w0.254: U1.9 22.3,18.9 22.575,19.175 D2.2 C8.2 ; R6.1 21.15,7 25.65,11.5 ; TP2.1 C8.2 ; R7.3 27.385,9.765 25.65,11.5 ; 25.65,11.5 R8.1 C8.2
NetD1_1: D1.1 L1.1 Q1.5 Q1.6 Q1.7 Q1.8 | length 10.4
  Top Layer w0.254: Q1.8 Q1.7 Q1.6 Q1.5 32.625,25.325 ; L1.1 31.975,25.975 32.625,25.325 ; D1.1 36.275,25.525 36.15,25.65 32.95,25.65 32.625,25.325
NetD1_2: D1.2 D1.3 | length 0.6
  Top Layer w0.254: D1.3 D1.2
NetQ1_4: Q1.4 U1.11 | length 14.7
  Top Layer w0.254: U1.11 21.625,19.9 22.125,20.4 32.125,20.4 32.625,20.9 Q1.4
NetR1_1: R1.1 U1.10 | length 16
  Top Layer w0.254: U1.10 22.025,19.4 22.475,19.85 28.8,19.85 31.775,16.875 R1.1
NetR1_2: R1.2 R6.2 R7.1 R7.2 | length 26.4
  Top Layer w0.254: R6.2 23.175,3.125 25.66,5.61 R7.2 28.2,7.225 R7.1 33.135,4.685 33.925,5.475 R1.2
NetR2_2: R2.2 U1.4 | length 5
  Top Layer w0.254: R2.2 14.3,18.5 14.7,18.9 U1.4
NetR4_2: R4.2 U1.5 | length 7
  Top Layer w0.254: R4.2 15.375,15.775 17.1,17.5 U1.5
NetR5_2: R5.2 U1.6 | length 8.7
  Top Layer w0.254: R5.2 13.35,13.05 17.6,17.3 U1.6
NetR9_1: R9.1 TP1.1 U1.7 U2.8 | length 16.1
  Top Layer w0.254: TP1.1@11.5,6.675 R9.1 14.65,10.35 15.6,11.3 U2.8 15.6,14.55 18.1,17.05 U1.7
SCK: U2.3 X2.2 | length 26.8
  Top Layer w0.254: X2.2 5.485,15.54 6.875,14.15 6.875,5.55 8.325,4.1 14.975,4.1 16.9,6.025 U2.3
VIN: C3.1 C5.2 L1.2 R2.1 U1.12 U2.1 U2.6 X2.5 | length 94.9
  Top Layer w0.254: X2.5 5.56,23.16 6.75,24.35 6.75,30.3 8.725,32.275 C3.1@19.725,32.275 ; v1(8.05,17.125) 8.05,17.975 8.575,18.5 R2.1 ; v1(13.95,6.525) 14.95,6.525 15.6,7.175 U2.1 15.6,9.875 16.9,11.175 U2.6 ; U1.12 20.9,20.4 22.325,21.825 22.325,23.425 ; C5.2 23.275,24.375 22.325,23.425 ; L1.2 31.975,34.225 30.9,35.3 20.975,35.3 19.725,34.05 C3.1 C3.1@19.725,32.275 ; C3.1@19.725,32.275 19.725,29.625 22.325,27.025 22.325,23.425
  Bottom Layer w0.254: X2.5 5.365,23.16 8.05,20.475 v1(8.05,17.125) 8.05,8.325 9.85,6.525 v1(13.95,6.525)
pads on no net: D1.4 D1.6 Q1. Q1.3@31.325,24.975

## Polygon pours and split planes (outlines as drawn)
GND on Bottom Layer "Bottom-GND" (solid, pour order 0): 0,0 0,40 50,40 50,0

## Keep-outs
Top Layer:
  lines w0.05: 0,39.995 0.005,40 ; 0,0 0,40 50,40 50,0 0,0

## Other copper
Top Layer:
  rectangle net GND: 24.375,25.325 26.675,30.3
  rectangle net GND: 26.425,22.3 29.288,30.3
  rectangle net VIN: 5.25,23.625 7.875,29.375
  rectangle net VIN: 2.725,22.6 7.875,23.675
  rectangle net VIN: 8.575,28 20.475,33.775
  rectangle net VIN: 8.575,33.775 34.199,38.025
  rectangle net NetC6_2: 46.4,19.125 49.275,20.825
  rectangle net GND: 38.175,14.025 49.275,18.875
  region: 23.05,29.075
  region net GND: 23.175,30.3 24.375,30.3 24.375,29
  region net GND: 29.288,30.3 26.263,33.325 21.95,33.325 21.95,31.525 23.175,30.3
  region net GND: 32.15,22.3 26.425,22.3 27.637,20.95 31.9,20.95 32.15,21.2
  region net VIN: 34.199,33.775 34.199,31.675 30.75,31.675 28.625,33.8 28.6,33.8
  region net VIN: 18.975,20.525 18.975,20.8 21.35,23.175 21.35,20.85 20.9,20.4
  region: 25.525,21.225
  region net VIN: 23.825,21.025 25.375,21.986 25.925,22.3 25.925,25.1 23.125,25.1 23.125,21.8
  region net VIN: 20.475,28 21.35,27.125 21.35,21.025 23.825,21.025 23.125,21.8 23.125,28.4 22.1,29.575 20.475,31.2
  region net VIN: 8.575,28 7.875,27.425 7.875,29.375 7.9,29.375 8.575,30.05
  region net VIN: 7.9,29.375 8.575,30.05 8.575,38.025 6.75,38.025 5.25,36.525 5.25,29.375
  region net NetC6_2: 49.275,20.772 49.275,23.2 48.3,24.175 36.975,24.175 36.975,22.775 36.725,22.525 34.125,22.525 34.125,20.975 34.272,20.828
  region: 19.725,32.425

## Silkscreen, mask and mechanical layers (free items; w line width, h text height)
Top Overlay:
  text "HV9150" at 37.625,36.3 h1.52
  text "DevKit" at 37.625,33.8 h1.52
  text "VOUT" at 45.45,24.675 h1
  text "GND" at 46.4,12.325 h1